# Altium PCB SAMV71_Xplained_Ultra.PcbDoc (part 6 of 9)
Units mm, origin at the board's own origin, x right, y up, seen from the top; angles counter-clockwise.
Board outline 90 x 135 mm, 8 copper layers (Top Layer LF-Signals, Ground Plane 1 (GND), Power Plane (VCC), Ground Plane 2 (GND), Signal Layer 1, Signal Layer 2, Ground Plane 3 (GND), Bottom Layer LF-Signals), stack 1.632 mm thick; 483 components, 411 nets, 1994 pads, 1021 vias.
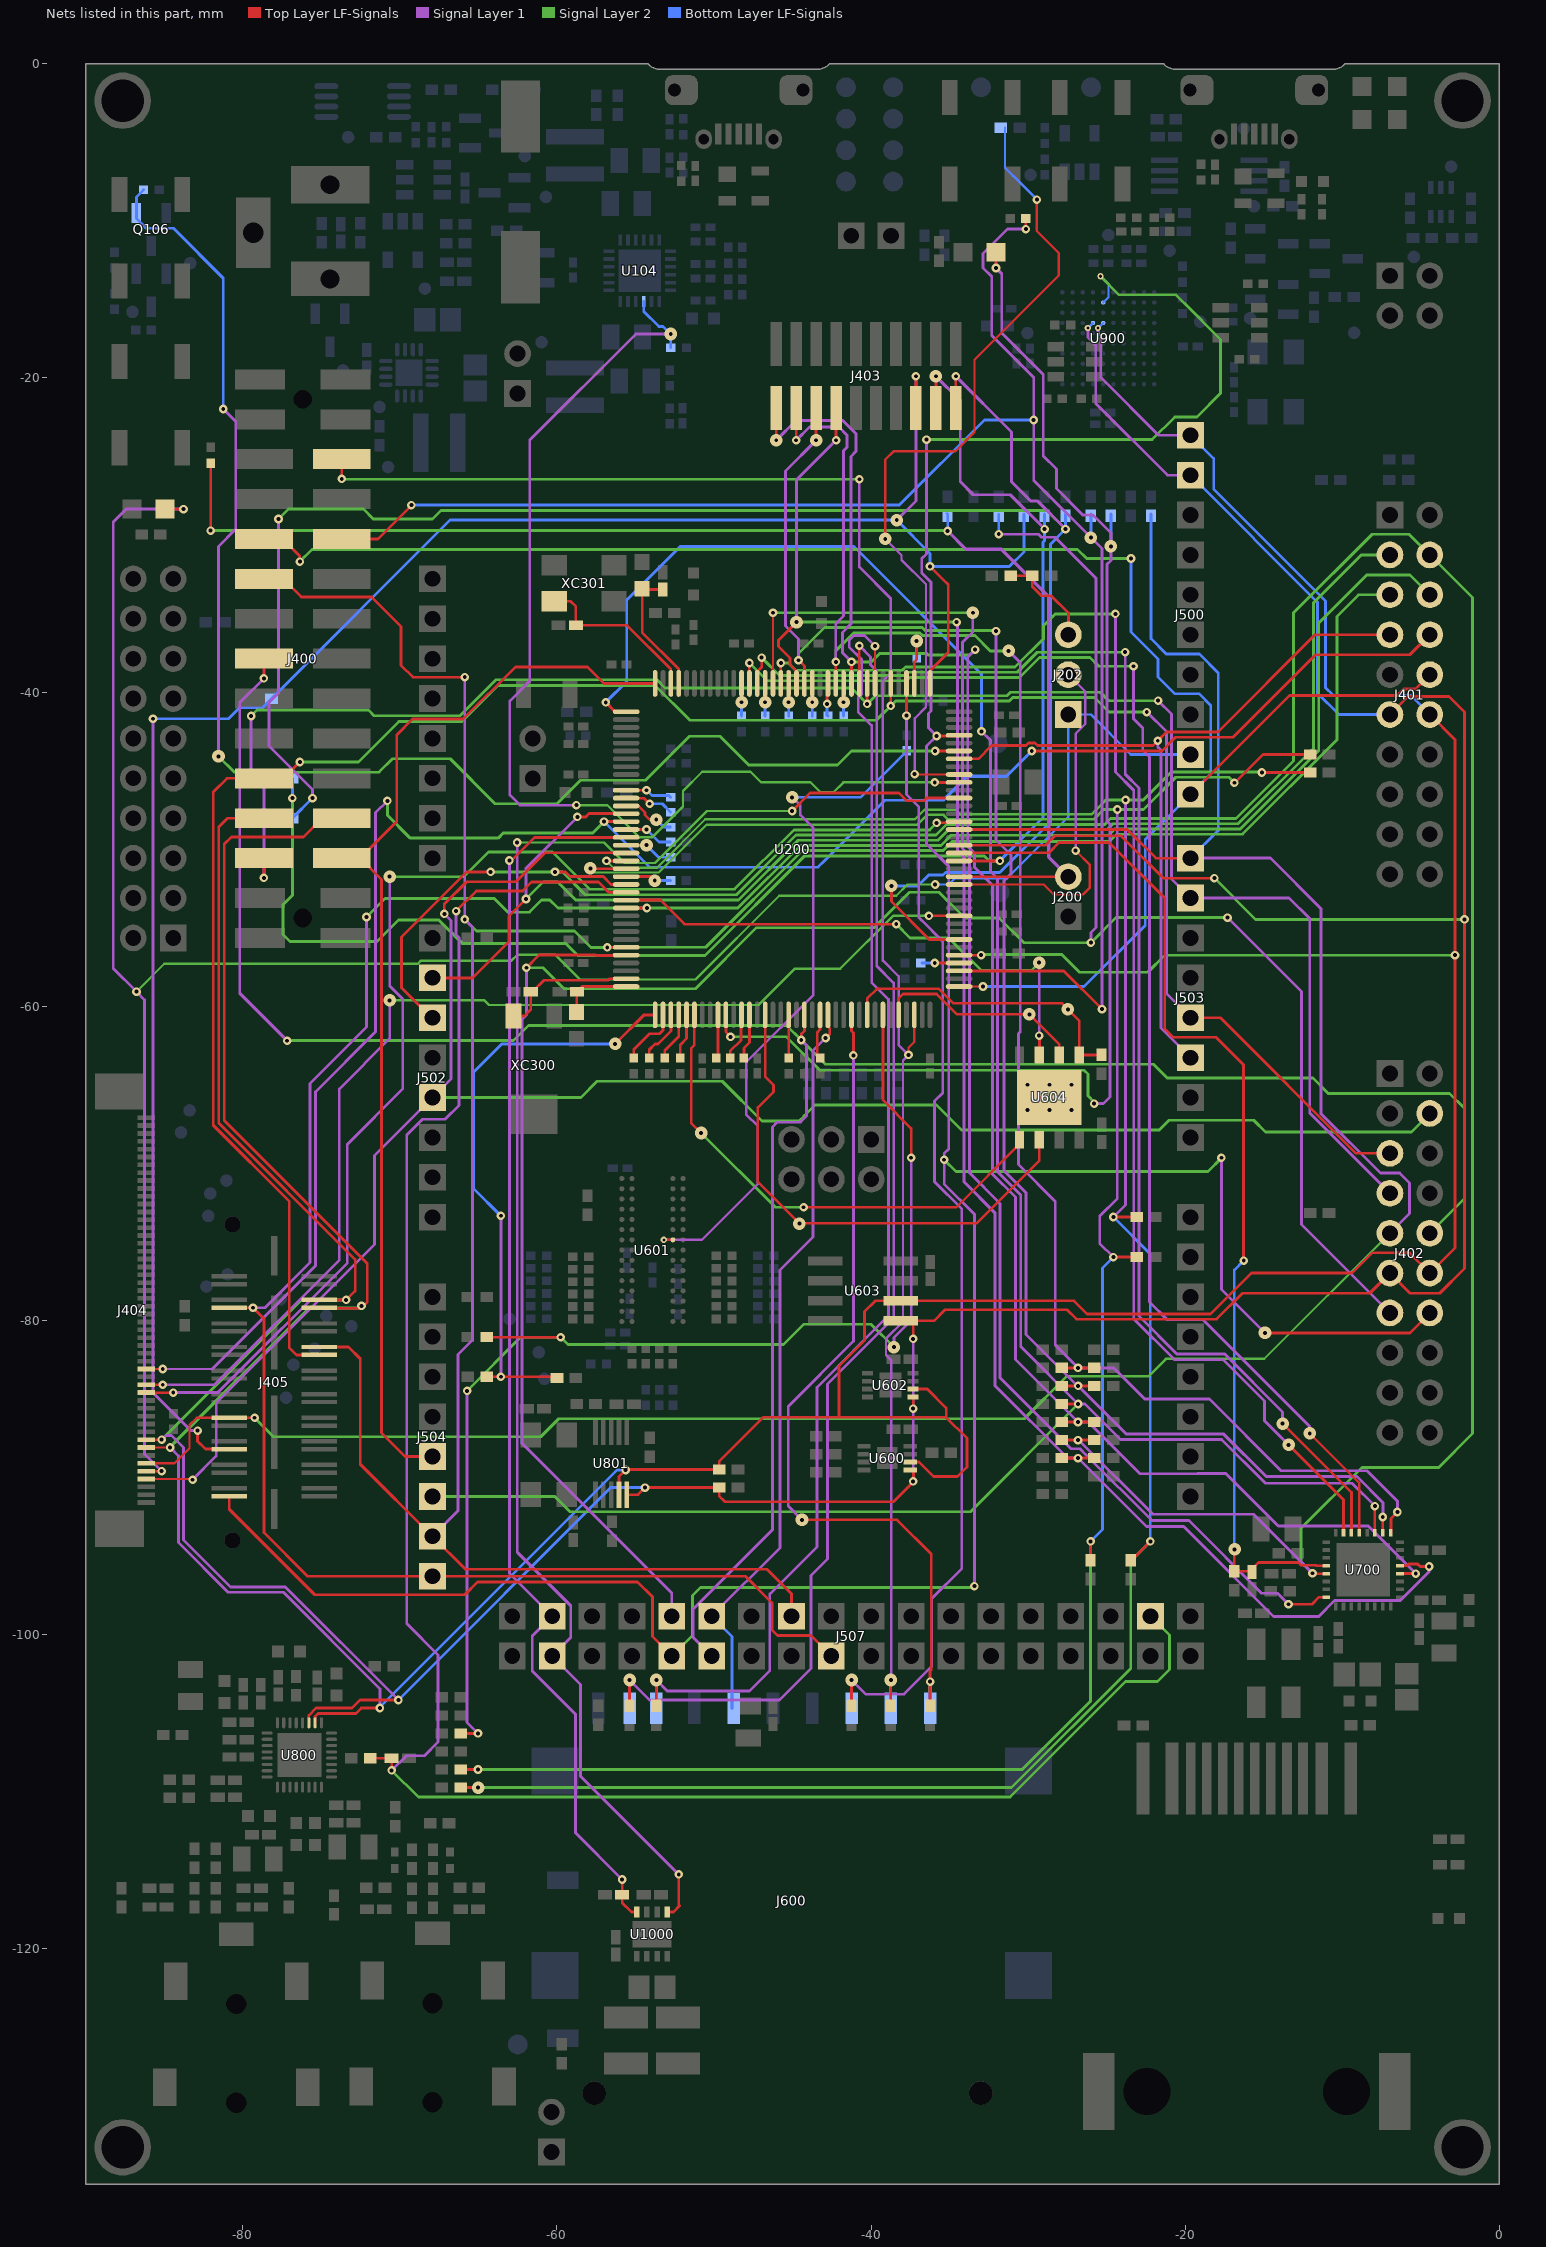
[diagram p11: the nets of this part, all layers, seen from the top]

## Via types
v1: diameter 0.55, hole 0.25, Top Layer LF-Signals to Bottom Layer LF-Signals, 546 vias
v2: diameter 0.55, hole 0.25, Top Layer LF-Signals to Bottom Layer LF-Signals, tented both sides, 190 vias
v3: diameter 0.55/0.55/0.55/0.8 (per signal layer), hole 0.25, Top Layer LF-Signals to Bottom Layer LF-Signals, tented top, 179 vias
v4: diameter 0.4, hole 0.2, Top Layer LF-Signals to Bottom Layer LF-Signals, 40 vias
v5: diameter 0.55, hole 0.25, Top Layer LF-Signals to Bottom Layer LF-Signals, tented top, 24 vias
v6: diameter 0.4, hole 0.2, Top Layer LF-Signals to Bottom Layer LF-Signals, tented both sides, 16 vias
v7: diameter 0.7, hole 0.35, Top Layer LF-Signals to Bottom Layer LF-Signals, 9 vias
v8: diameter 0.4/0.4/0.4/0.8 (per signal layer), hole 0.2, Top Layer LF-Signals to Bottom Layer LF-Signals, tented top, 6 vias
v9: diameter 0.4, hole 0.2, Top Layer LF-Signals to Bottom Layer LF-Signals, tented top, 5 vias
v10: diameter 0.66, hole 0.33, Top Layer LF-Signals to Bottom Layer LF-Signals, tented top, 4 vias
v11: diameter 0.55/0.55/0.55/0.8 (per signal layer), hole 0.25, Top Layer LF-Signals to Bottom Layer LF-Signals, 2 vias

## Nets (pads, with @x,y where several pads share a name; then routed paths per layer and width w, separated by ;. In a path a pad name is that pad's centre, name@x,y a point inside that pad or via, vN(x,y) a via of type N, cw(c..) or ccw(c..) an arc to the next point about the centre after c; other vN are vias at no path point) (continued)
NWR1/NBS1: R269.2 U601.J2 | length 43.8
  Top Layer LF-Signals w0.179: v4(-53.197,-74.875) U601.J2@-52.622,-74.875
  Signal Layer 1 w0.155: v4(-53.197,-74.875) -50.784,-74.875 -47.213,-71.303 -47.213,-67.636 -47.963,-66.886 -47.963,-63.572 -43.675,-59.284 -43.675,-48.66 -44.506,-47.83 -44.506,-47.221 v3(-45.025,-46.702)
  Bottom Layer LF-Signals w0.179: v3(-45.025,-46.702) -40.677,-46.702 R269.2@-37.725,-43.75
PA00: J401.7@-6.97,-36.35 J503.3@-19.67,-63.274 U200.102 | length 51.9
  Top Layer LF-Signals w0.175: U200.102@-34.4,-44.25 -33.175,-44.25 -32.325,-43.4 -30.149,-43.4 -29.987,-43.237 -29.563,-43.237 -29.401,-43.4 -22.05,-43.4 v1(-21.75,-43.1) -21.19,-42.54 -17.92,-42.54 -11.73,-36.35 J401.7@-6.97,-36.35
  Signal Layer 1 w0.175: v1(-21.75,-43.1) -21.75,-43.489 -21.55,-43.689 -21.55,-61.394 J503.3@-19.67,-63.274
PA01: R134.1 U104.3 U200.99 | length 71.6
  Top Layer LF-Signals w0.18: v1(-35.952,-45.752) -34.448,-45.752 -34.423,-45.727 U200.99@-34.4,-45.75
  Signal Layer 1 w0.175: v1(-58.771,-47.2) -62.359,-47.2 -63,-46.559 -63,-40.575 -61.732,-39.307 -61.732,-23.957 -54.98,-17.205 v3(-52.757,-17.205)
  Signal Layer 2 w0.15: v1(-58.771,-47.2) -56.797,-47.2 -54.747,-49.25 -53.953,-49.25 -51.982,-47.279 -51.982,-46.302 -50.755,-45.075 -47.677,-45.075 -47.012,-45.74 -43.867,-45.74 -43.229,-46.378 -42.389,-46.378 -41.764,-45.752 v1(-35.952,-45.752) v1@-35.964,-45.74
  Bottom Layer LF-Signals w0.175: U104.3@-54.482,-15.13 -54.482,-15.755 -53.519,-16.718 -53.244,-16.718 v3(-52.757,-17.205) R134.1@-52.757,-18.08
PA02: J402.9@-6.97,-74.45 J404.45 J405.16 J503.8@-19.67,-50.574 R914.1 U200.93 | length 162.1
  Top Layer LF-Signals w0.15: J404.45@-86.15,-89.1 -84.35,-89.1 -83.393,-88.143 -83.393,-86.668 -82.925,-86.2 J405.16@-80.87,-86.2 v1(-79.25,-86.2)
  Top Layer LF-Signals w0.175: U200.93@-34.4,-48.75 -23.695,-48.75 -21.871,-50.574 J503.8@-19.67,-50.574
  Signal Layer 1 w0.18: J503.8@-19.67,-50.574 -14.576,-50.574 -11.35,-53.8 -11.35,-66.85 -7.575,-70.625 -6.35,-70.625 -5.725,-71.25 -5.725,-73.205 J402.9@-6.97,-74.45
  Signal Layer 2 w0.15: -21.225,-82.45 -14.97,-82.45 J402.9@-6.97,-74.45
  Signal Layer 2 w0.175: v1(-79.25,-86.2) -78.038,-87.412 -61.037,-87.412 -59.888,-86.263 -30.252,-86.263 -27.555,-83.567 -22.342,-83.567 -21.225,-82.45
  Bottom Layer LF-Signals w0.175: R914.1@-22.184,-28.668 -22.184,-36.602 -21.211,-37.575 -19.1,-37.575 -17.9,-38.775 -17.9,-48.804 J503.8@-19.67,-50.574
PA03: J400.8 J401.11@-6.97,-41.43 J402.11@-6.97,-76.99 J404.42 J405.35 J500.9@-19.67,-26.19 R232.2 U200.91 U600.5 U602.5 U603.5 U800.3 U801.10 U900.G7 | length 290.5
  Top Layer LF-Signals w0.15: J404.42@-86.15,-87.6 v1(-85.175,-87.6)
  Top Layer LF-Signals w0.175: J400.8@-78.661,-48.034 -80.984,-48.034 -81.536,-48.586 -81.536,-67.434 -72.85,-76.12 -72.85,-78.125 v1(-73.425,-78.7) J405.35@-75.13,-78.7 ; U800.3@-75.8,-105.625 -75.8,-105.148 -75.34,-104.687 -73.063,-104.687 -72.543,-104.168 -70.107,-104.168 v1(-70.1,-104.175) ; U801.10@-55.55,-91.1 -54.85,-91.1 v1(-54.4,-90.65) R232.2@-49.675,-90.65 -49.675,-91.175 -49.3,-91.55 -38.575,-91.55 v1@-37.3,-90.275 ; U603.5@-38.125,-80.03 U603.5@-37.37,-80.03 ; U600.5@-37.5,-89.525 -37.3,-89.525 v1@-37.3,-90.25 ; v1(-37.325,-85.625) U602.5@-37.325,-84.875 ; v1(-37.325,-81.175) -37.325,-80.075 U603.5@-37.37,-80.03 ; U200.91@-34.4,-49.75 -28.906,-49.75 -28.31,-49.154 -24.096,-49.154 -21.4,-51.85 v1(-18.15,-51.85) ; J401.11@-6.97,-41.43 -5.824,-40.284 -3.216,-40.284 -2.225,-41.275 v1(-2.225,-54.475) -2.225,-76.7 -3.8,-78.275 -5.685,-78.275 J402.11@-6.97,-76.99 -8.255,-78.275 -16.35,-78.275 -18.001,-79.926 -26.918,-79.926 -27.52,-79.325 -35.3,-79.325 -36.005,-80.03 U603.5@-37.37,-80.03
  Signal Layer 1 w0.175: v1(-85.175,-87.6) -84.9,-87.325 -84.55,-87.325 -83.775,-88.1 -83.775,-93.975 -80.775,-96.975 -77.3,-96.975 v1(-70.1,-104.175) ; v1(-37.325,-90.25) v1(-37.325,-85.625) v1(-37.325,-81.175) ; v6(-26.2,-16.825) -26.2,-17.425 -25.7,-17.925 -25.7,-21.629 -21.139,-26.19 J500.9@-19.67,-26.19
  Signal Layer 2 w0.175: v1(-85.175,-87.6) -76.275,-78.7 v1(-73.425,-78.7) ; v1(-18.15,-51.85) -15.525,-54.475 v1(-2.225,-54.475)
  Bottom Layer LF-Signals w0.15: v6(-26.2,-16.825) U900.G7@-25.875,-16.5
  Bottom Layer LF-Signals w0.175: v1(-70.1,-104.175) -56.575,-90.65 v1(-54.4,-90.65) ; J500.9@-19.67,-26.19 -11.575,-34.285 -11.575,-40.075 -10.22,-41.43 J401.11@-6.97,-41.43
PA04: J400.7 J401.12@-4.43,-41.43 J402.12@-4.43,-76.99 J404.43 J405.33 J500.10@-19.67,-23.65 R231.2 U200.77 U600.6 U602.6 U603.6 U800.2 U801.9 U900.F7 | length 301.2
  Top Layer LF-Signals w0.15: J404.43@-86.15,-88.1 v1(-84.625,-88.1)
  Top Layer LF-Signals w0.175: U800.2@-75.4,-105.625 -75.4,-105.225 -75.2,-105.025 -72.8,-105.025 -72.455,-104.68 v1(-71.275,-104.68) ; J405.33@-75.13,-79.2 -75.105,-79.225 -72.475,-79.225 -72.45,-79.2 -72.075,-78.825 -72.075,-76.4 -81.186,-67.289 -81.186,-49.686 -80.725,-49.225 -76.15,-49.225 -74.959,-48.034 J400.7@-73.708,-48.034 ; U801.9@-56.05,-91.1 -56.05,-89.948 v1(-55.627,-89.525) -55.602,-89.5 R231.2@-49.675,-89.5 -49.675,-88.975 -46.875,-86.175 -42.05,-86.175 ; U600.6@-37.5,-89.025 -36.95,-89.025 -36.025,-89.95 -34.5,-89.95 -33.9,-89.35 -33.9,-87.5 -35.225,-86.175 ; U602.6@-37.325,-84.375 -36.425,-84.375 -35.225,-85.575 -35.225,-86.175 ; U200.77@-34.4,-56.75 v1(-33,-56.75) ; J401.12@-4.43,-41.43 -2.825,-43.035 v1(-2.825,-56.75) -2.825,-75.385 J402.12@-4.43,-76.99 -5.72,-75.7 -8.1,-75.7 -9.39,-76.99 -15.79,-76.99 -18.401,-79.601 -26.249,-79.601 -27.09,-78.76 U603.6@-38.125,-78.76 -39.735,-78.76 -40.425,-79.45 -40.425,-81.275 -42.05,-82.9 -42.05,-86.175 ; -42.05,-86.175 -35.225,-86.175
  Signal Layer 1 w0.175: v1(-84.625,-88.1) -84.1,-88.625 -84.1,-94.15 -80.94,-97.31 -77.425,-97.31 -71.275,-103.46 v1(-71.275,-104.68) ; v6(-25.55,-16.825) -25.55,-17.125 -25.375,-17.3 -25.375,-19.975 -21.7,-23.65 J500.10@-19.67,-23.65
  Signal Layer 2 w0.175: v1(-84.625,-88.1) -84.625,-88.05 -75.787,-79.213 -72.463,-79.213 v1@-72.45,-79.2 ; v1(-33,-56.75) -32.962,-56.712 -27.863,-56.712 -26.736,-57.84 -22.39,-57.84 -21.3,-56.75 v1(-2.825,-56.75)
  Bottom Layer LF-Signals w0.15: v6(-25.55,-16.825) U900.F7@-25.225,-16.5
  Bottom Layer LF-Signals w0.175: v1@-71.155,-104.68 v1(-71.275,-104.68) -71.275,-104.625 -56.175,-89.525 v1(-55.627,-89.525) ; J500.10@-19.67,-23.65 -18.192,-25.127 -18.192,-27.083 -11.075,-34.2 -11.075,-39.725 -10.6,-40.2 -5.66,-40.2 J401.12@-4.43,-41.43
  other v1: -72.45,-79.075
PA05: J400.22 J401.10@-4.43,-38.89 J500.1@-19.67,-46.51 U200.73 | length 117.2
  Top Layer LF-Signals w0.15: U200.73@-34.4,-58.75 v1(-32.875,-58.75) ; J500.1@-19.67,-46.51 J500.1@-19.23,-46.95
  Top Layer LF-Signals w0.175: J400.22@-78.661,-30.254 -77.446,-30.254 -76.375,-31.325 v1(-76.375,-31.7) ; J500.1@-19.67,-46.51 -13.371,-40.211 -6.504,-40.211 -6.099,-39.807 -5.347,-39.807 J401.10@-4.43,-38.89
  Signal Layer 2 w0.175: v1(-76.375,-31.7) -75.591,-30.916 -26.859,-30.916 -26.275,-31.5 v1(-23.459,-31.5)
  Bottom Layer LF-Signals w0.175: v1(-32.875,-58.75) -26.45,-58.75 -22.55,-54.85 -22.55,-49.39 J500.1@-19.67,-46.51 -18.375,-45.215 -18.375,-40.85 -19.125,-40.1 -20.675,-40.1 -21.738,-39.037 -21.738,-37.887 -23.459,-36.166 v1(-23.459,-31.5)
PA06: J400.10 J402.5@-6.97,-69.37 J405.25 J503.4@-19.67,-60.734 U200.114 | length 142
  Top Layer LF-Signals w0.175: v1(-76.375,-44.45) -77.419,-45.494 J400.10@-78.661,-45.494 -81.019,-45.494 -81.886,-46.361 -81.886,-67.579 -77.05,-72.415 -77.05,-81.725 -76.575,-82.2 J405.25@-75.13,-82.2 ; J503.4@-19.67,-60.734 -17.766,-60.734 -9.13,-69.37 J402.5@-6.97,-69.37
  Top Layer LF-Signals w0.18: v1(-38.75,-40.875) U200.114@-38.75,-39.45
  Signal Layer 1 w0.18: v1(-22.45,-41.275) -21.205,-42.52 -21.205,-59.199 J503.4@-19.67,-60.734
  Signal Layer 2 w0.175: v1(-76.375,-44.45) -72.65,-44.45 -70.064,-41.864
  Signal Layer 2 w0.18: -70.064,-41.864 -66.063,-41.864 -63.774,-39.575 -53.75,-39.575 -51.53,-41.795 -39.67,-41.795 -38.436,-40.561 -31.209,-40.561 -30.988,-40.34 -25.785,-40.34 -24.85,-41.275 v1(-22.45,-41.275)
PA07_XIN32: C301.1 U200.35 XC300.2 | length 8.8
  Top Layer LF-Signals w0.175: XC300.2@-62.775,-60.625 -62.075,-60.625 -61.675,-60.225 C301.1@-61.675,-59.075 -61.55,-59.075 -60.825,-58.35 -56.75,-58.35 -56.65,-58.25 U200.35@-55.6,-58.25
PA08_XOUT32: C300.1 J300.2 U200.36 | length 4.6
  Top Layer LF-Signals w0.175: J300.2@-58.75,-60.375 -58.75,-59.1 C300.1@-58.725,-59.075 -58.4,-58.75 U200.36@-55.6,-58.75
PA09: J400.21 R300.2 R911.1 U200.75 | length 114.1
  Top Layer LF-Signals w0.175: J400.21@-73.708,-30.254 -71.404,-30.254 -69.275,-28.125 v1(-69.275,-28.1) ; v2(-30.15,-10.525) R300.2@-30.15,-9.85
  Top Layer LF-Signals w0.18: U200.75@-34.4,-57.75 -27.734,-57.75 v1(-25.3,-60.184)
  Signal Layer 1 w0.18: v2(-30.15,-10.525) -31.325,-10.525 -32.875,-12.075 -32.875,-13 -32.325,-13.55 -32.325,-17.308 -29.65,-19.983 v1(-29.65,-22.675) -29.65,-26.525 v3(-26.009,-30.166) -25.305,-30.87 -25.305,-60.179 v1(-25.3,-60.184)
  Bottom Layer LF-Signals w0.175: v3(-26.009,-30.166) R911.1@-26.009,-28.668
  Bottom Layer LF-Signals w0.18: v1(-69.275,-28.1) -38.208,-28.1 -32.783,-22.675 v1(-29.65,-22.675)
PA10: R220.1 R228.1 U200.66 | length 80.2
  Top Layer LF-Signals w0.175: R228.1@-66.125,-106.3 v1(-65.025,-106.3) ; R220.1@-64.475,-81.069 v1@-59.769,-81.069 ; U200.66@-39.25,-60.55 -39.25,-65.975 -37.45,-67.775 v1(-37.45,-69.65)
  Signal Layer 1 w0.175: v1(-65.725,-84.489) -65.725,-105.6 v1(-65.025,-106.3) ; v3(-38.55,-81.7) -38.55,-81.104 -37.45,-80.004 v1(-37.45,-69.65)
  Signal Layer 2 w0.175: v1(-65.725,-84.489) -62.311,-81.075 v1(-59.769,-81.075) -59.307,-81.538 -45.577,-81.538 -44.295,-80.256 -39.994,-80.256 v3(-38.55,-81.7) v3@-38.563,-81.713
PA11: R605.2 U200.64 U604.1 | length 19.2
  Top Layer LF-Signals w0.165: U200.64@-40.25,-60.55 -40.25,-59.514 -39.636,-58.9 -35.69,-58.9 -34.765,-59.825 -27.85,-59.825 -26.745,-60.93 U604.1@-26.745,-63.1
  Top Layer LF-Signals w0.175: U604.1@-26.745,-63.1 R605.2@-25.325,-63.1
  other v3: -27.475,-60.2
PA12: U200.68 U604.2 | length 13.4
  Top Layer LF-Signals w0.165: U200.68@-38.25,-60.55 -38.25,-59.514 -37.961,-59.225 -35.825,-59.225 -34.525,-60.525 v3(-29.925,-60.525) -28.015,-62.435 U604.2@-28.015,-63.1
PA13: U200.42 U604.5 | length 32
  Top Layer LF-Signals w0.165: U200.42@-51.25,-60.55 -51.258,-60.558 -51.258,-62.235 -51.25,-62.243 -51.25,-62.484 -51.442,-62.676 -51.442,-67.458 v3(-50.825,-68.075) ; v1(-44.3,-72.8) -34.572,-72.8 U604.5@-30.555,-68.783
  Top Layer LF-Signals w0.175: U604.5@-30.555,-68.783 U604.5@-30.555,-68.5
  Signal Layer 2 w0.175: v3(-50.825,-68.075) -46.1,-72.8 v1(-44.3,-72.8)
PA14: U200.51 U604.6 | length 33.3
  Top Layer LF-Signals w0.15: U200.51@-46.75,-60.55 U200.51@-46.717,-60.583
  Top Layer LF-Signals w0.165: U200.51@-46.75,-60.55 -46.75,-64.485 -46.216,-65.019 -46.216,-65.454 -47.212,-66.45 -47.212,-71.197 v3(-44.567,-73.842) ; v3@-44.567,-73.82 -33.286,-73.82 -29.285,-69.819 U604.6@-29.285,-68.5
PA15: R249.1 U200.49 | length 2.9
  Top Layer LF-Signals w0.179: R249.1@-48.1,-63.3 -48.1,-62.655 -47.75,-62.305 U200.49@-47.75,-60.55 U200.49@-47.775,-60.575
PA16: R250.1 U200.45 | length 2.8
  Top Layer LF-Signals w0.179: R250.1@-49.85,-63.3 -49.75,-63.2 U200.45@-49.75,-60.55
PA17: U200.25 U604.3 | length 34.3
  Top Layer LF-Signals w0.175: U200.25@-55.6,-53.25 -55.6,-53.237 -53.419,-53.237 -51.881,-54.775 v1@-38.375,-54.775 ; v1(-29.3,-61.875) -29.285,-61.89 U604.3@-29.285,-63.1
  Signal Layer 1 w0.175: v1(-29.3,-61.875) v3(-29.3,-57.225)
  Signal Layer 2 w0.175: v1(-38.4,-54.775) -37.525,-55.65 -35.06,-55.65 -32.985,-57.725 -29.8,-57.725 v3(-29.3,-57.225)
PA18: C800.2 J507.3 R801.1 U200.24 | length 131.2
  Top Layer LF-Signals w0.15: v1(-70.525,-108.65) C800.2@-70.525,-107.875
  Top Layer LF-Signals w0.175: R801.1@-71.9,-107.875 C800.2@-70.525,-107.875 ; v1(-66.425,-53.95) -65.137,-52.662 -62.184,-52.662 -61.62,-52.098 -57.358,-52.098 -56.706,-52.75 U200.24@-55.6,-52.75
  Signal Layer 1 w0.175: v1(-70.525,-108.65) -69.6,-107.725 -68.45,-107.725 -67.575,-106.85 -67.575,-101.3 -69.56,-99.315 -69.56,-68.185 -68.575,-67.2 -67.125,-67.2 -66.241,-66.316 -66.241,-55.634 -66.425,-55.45 v1(-66.425,-53.95)
  Signal Layer 2 w0.175: v1(-70.525,-108.65) -68.825,-110.35 -31.151,-110.35 -23.801,-103 -21.775,-103 -21,-102.225 -21,-100.044 J507.3@-22.21,-98.834
PA19: J401.4@-4.43,-31.27 J502.3@-67.93,-60.734 R706.1 R720.1 U200.23 U700.29 | length 189.3
  Top Layer LF-Signals w0.15: v1(-11.9,-96.1) -11.875,-96.125 U700.29@-11.025,-96.125
  Top Layer LF-Signals w0.18: J502.3@-67.93,-60.734 -67.991,-60.734 -69.9,-58.825 -69.9,-55.585 -65.765,-51.45 v1(-64.225,-51.45) ; v1(-60.125,-51.45) -59.472,-51.45 -59.169,-51.753 -57.053,-51.753 -56.556,-52.25 U200.23@-55.6,-52.25 U200.23@-55.615,-52.265 ; R706.1@-27.869,-87.623 R720.1@-25.794,-87.623
  Signal Layer 1 w0.18: v1@-26.863,-87.623 v1(-26.825,-87.623) -26.787,-87.623 -22.061,-92.349 -15.651,-92.349 v1(-11.9,-96.1)
  Signal Layer 2 w0.18: v1(-64.225,-51.45) v1(-60.125,-51.45) -59.654,-51.45 -58.199,-52.905 -48.581,-52.905 -44.779,-49.103 -35.872,-49.103 -35.198,-48.429 -25.129,-48.429 -24.758,-48.058 -16.771,-48.058 -13.1,-44.387 -13.1,-34.955 -8.095,-29.95 -5.75,-29.95 J401.4@-4.43,-31.27 -1.71,-33.99 -1.71,-87.203 -3.866,-89.359 -8.747,-89.359 -12.629,-93.241 -12.629,-95.371 v1(-11.9,-96.1)
PA20: R262.1 U200.22 | length 2.9
  Top Layer LF-Signals w0.179: U200.22@-55.6,-51.75 -54.025,-51.75 v3(-53.775,-52)
  Bottom Layer LF-Signals w0.179: v3(-53.775,-52) R262.1@-52.767,-52
PA21: J402.13@-6.97,-79.53 J507.27 R910.1 U200.32 | length 163.2
  Top Layer LF-Signals w0.18: v1(-61.95,-57.55) -61.135,-56.735 -57.538,-56.735 -57.508,-56.765 -55.6,-56.765 U200.32@-55.6,-56.75
  Signal Layer 1 w0.18: v1(-61.95,-57.55) -61.95,-60.563 -62.22,-60.833 -62.22,-87.83 -52.69,-97.36 J507.27@-52.69,-98.834 ; v1(-31.875,-29.95) -29.353,-29.95 -29.163,-30.14 -28.301,-30.14 -25.685,-32.756 -25.685,-54.99 -26.009,-55.314 v1(-26.009,-55.957) ; v1(-17.307,-54.362) -12.595,-59.074 -12.595,-73.905 J402.13@-6.97,-79.53
  Signal Layer 2 w0.15: -36.154,-52.75 -36.133,-52.75 -35.663,-52.75
  Signal Layer 2 w0.18: v1(-61.95,-57.55) -60.9,-57.55 -59.557,-58.893 -51.186,-58.893 -47.293,-55 -39.802,-55 -37.552,-52.75 -36.154,-52.75 ; -35.663,-52.75 -34.029,-54.384 -31.848,-54.384 -30.275,-55.957 v1(-26.009,-55.957) -24.414,-54.362 v1(-17.307,-54.362)
  Bottom Layer LF-Signals w0.18: v1(-31.875,-29.95) R910.1@-31.875,-28.675
PA22: R221.1 R225.1 U200.37 | length 37.7
  Top Layer LF-Signals w0.185: R221.1@-64.475,-83.594 v1(-63.575,-83.594) -60.081,-83.594 R225.1@-60,-83.675 ; v3(-56.303,-62.403) -54.45,-60.55 U200.37@-53.75,-60.55
  Signal Layer 1 w0.185: v1@-63.575,-83.6 v1(-63.575,-83.594) v1(-63.575,-73.339)
  Bottom Layer LF-Signals w0.185: v1(-63.575,-73.339) -65.317,-71.597 -65.317,-64.2 -63.519,-62.403 v3(-56.303,-62.403)
PA23: D301.1 R912.1 U200.46 | length 87.9
  Top Layer LF-Signals w0.18: U200.46@-49.25,-60.55 -49.25,-61.65 v1(-48.95,-61.95) ; v1(-32.05,-13) D301.1@-32.05,-12
  Signal Layer 1 w0.175: -29.475,-19.35 -29.042,-19.783 -29.042,-21.925
  Signal Layer 1 w0.18: v1(-32.05,-13) -31.684,-13.366 -31.684,-17.141 -29.475,-19.35 ; -29.042,-21.925 -29.042,-24.965 -28.2,-25.807 -28.2,-27.05 -26.525,-28.725 -25.875,-28.725 -24.734,-29.866 v3(-24.734,-30.725) -24.734,-31.623 -24.975,-31.864 -24.975,-48.225 -24.785,-48.415 -24.785,-65.775 -25.21,-66.2 v1(-25.8,-66.2)
  Signal Layer 2 w0.18: v1(-48.95,-61.95) -45.378,-61.95 -43.253,-64.075 -26.45,-64.075 -26.2,-64.325 -26.2,-65.7 -25.8,-66.1 v1(-25.8,-66.2)
  Bottom Layer LF-Signals w0.175: v3(-24.734,-30.725) R912.1@-24.734,-28.668
PA24: J400.16 J402.10@-4.43,-74.45 J507.26 U200.56 | length 158.2
  Top Layer LF-Signals w0.175: v1@-78.661,-39.127 J400.16@-78.661,-37.874
  Top Layer LF-Signals w0.18: v1@-44.329,-62.15 v1(-44.45,-62.15) -44.45,-61.768 -44.25,-61.568 U200.56@-44.25,-60.55
  Signal Layer 1 w0.18: v1(-78.658,-39.13) -80.2,-40.672 -80.2,-59.175 v1(-77.176,-62.199) ; J507.26@-50.15,-101.374 -51.325,-100.199 -51.325,-98.375 -46.285,-93.335 -46.285,-67.696 -45.972,-67.383 -44.506,-67.383 -44.115,-66.992 -44.115,-62.485 v1(-44.45,-62.15)
  Signal Layer 2 w0.18: v1(-77.176,-62.199) -77.161,-62.184 -62.771,-62.184 -61.809,-61.221 -45.379,-61.221 v1(-44.45,-62.15) ; v1@-44.319,-62.15 v1(-44.45,-62.15) ; J402.10@-4.43,-74.45 -2.225,-72.245 -2.225,-66.5 -3.175,-65.55 -10.9,-65.55 -11.875,-64.575 -21.15,-64.575 -22.025,-63.7 -42.9,-63.7 v1(-44.45,-62.15)
PA25: J507.25 J600.5 U200.59 | length 47.3
  Top Layer LF-Signals w0.175: v1(-42.9,-62.025) -42.63,-61.755 -42.63,-61.42 U200.59@-42.75,-61.3
  Signal Layer 1 w0.175: J507.25@-50.15,-98.834 -45.8,-94.484 -45.8,-76.8 -43.7,-74.7 -43.7,-62.825 v1(-42.9,-62.025) v1@-42.9,-62.175
  Bottom Layer LF-Signals w0.175: J507.25@-50.15,-98.834 -48.85,-100.134 J600.5@-48.85,-104.7
PA26: J600.9 R608.1 U200.62 | length 54.9
  Top Layer LF-Signals w0.175: v3(-44.4,-92.7) -38.35,-92.7 -36.175,-94.875 -36.175,-102.25 -36.248,-102.323 v1(-36.248,-103) -36.248,-104.545 R608.1@-36.253,-104.55 ; U200.62@-41.25,-60.55 -41.25,-61.575 -41.127,-61.698 v1(-41.127,-63.128)
  Signal Layer 1 w0.175: v3(-44.4,-92.7) -45.275,-91.825 -45.275,-85.475 -41.127,-81.327 v1(-41.127,-63.128)
  Bottom Layer LF-Signals w0.175: J600.9@-36.248,-104.7 v1(-36.248,-103) v1@-36.248,-102.9
PA27: J400.25 J600.1 R607.1 U200.70 | length 119.4
  Top Layer LF-Signals w0.15: v1(-37.625,-63.1) -37.625,-62.65 -37.252,-62.277 U200.70@-37.252,-60.552
  Top Layer LF-Signals w0.175: v5@-73.708,-26.427 J400.25@-73.708,-25.174 ; R607.1@-38.753,-104.55 v3@-38.753,-102.9 ; U200.70@-37.252,-60.552 U200.70@-37.25,-60.55
  Signal Layer 1 w0.15: -38.75,-36.275 -38.75,-38.8 -39.25,-39.3 -39.25,-57.1 -38.252,-58.098 -38.252,-62.473 v1(-37.625,-63.1) -37.975,-63.45 -37.975,-80.087 -39.05,-81.162 -39.05,-82.2 -38.725,-82.525 v3@-38.725,-102.9
  Signal Layer 1 w0.175: v1(-40.75,-26.45) -40.75,-32.05 -38.75,-34.05 -38.75,-36.275
  Signal Layer 2 w0.15: v5(-73.705,-26.43) -73.685,-26.45 v1(-40.75,-26.45)
  Bottom Layer LF-Signals w0.15: J600.1@-38.748,-104.7 v3(-38.748,-102.9)
  Bottom Layer LF-Signals w0.175: v1@-40.895,-26.43 -40.875,-26.45 v1(-40.75,-26.45)
PA28: J600.2 R606.1 U200.112 | length 74.9
  Top Layer LF-Signals w0.175: R606.1@-41.253,-104.55 v3@-41.253,-102.9 ; v1(-37.75,-41.5) U200.112@-37.75,-39.45
  Signal Layer 1 w0.175: v3(-41.248,-102.9) -40.348,-103.8 -37.9,-103.8 -36.15,-102.05 -36.15,-97.725 -34.225,-95.8 -34.225,-72.91 -35.959,-71.176 -35.959,-66.045 -35.437,-65.524 -35.437,-55.883 -36.806,-54.515 -36.809,-54.515 -36.964,-54.359 -36.964,-47.311 -37.75,-46.525 v1(-37.75,-41.5)
  Bottom Layer LF-Signals w0.175: J600.2@-41.248,-104.7 v3(-41.248,-102.9)
PA29: U200.129 U700.32 | length 94.1
  Top Layer LF-Signals w0.15: U200.129@-46.25,-39.45 -46.25,-35.675 v1(-46.25,-34.95)
  Top Layer LF-Signals w0.175: v1(-13.425,-98.075) -11.925,-98.075 -11.475,-97.625 U700.32@-11.025,-97.625
  Signal Layer 1 w0.175: v3(-33.525,-34.95) -33.525,-36.175 -34.18,-36.83 -34.18,-49.953 -33.745,-50.388 -33.745,-70.605 -31.795,-72.555 -31.795,-83.656 -27.276,-88.175 -26.698,-88.175 -26.312,-88.561 -26.312,-88.563 -22.126,-92.75 -19.775,-92.75 -15.15,-97.375 -14.125,-97.375 v1(-13.425,-98.075)
  Signal Layer 2 w0.15: v1(-46.25,-34.95) v3(-33.525,-34.95)
PA30: J600.7 R610.1 U200.116 | length 85.9
  Top Layer LF-Signals w0.15: U200.116@-39.75,-39.45 v1@-39.75,-37.1
  Top Layer LF-Signals w0.175: R610.1@-53.678,-104.55 v3(-53.678,-102.9) ; v1@-39.75,-37.1 v1(-39.75,-37.075)
  Signal Layer 1 w0.175: v3(-53.678,-102.9) -52.978,-103.6 -47.75,-103.6 -46.45,-102.3 -46.45,-97.425 -43.45,-94.425 -43.45,-84.265 -38.889,-79.705 -38.889,-59.561 -39.965,-58.485 -39.965,-42.121 -40.826,-41.26 -40.826,-40.334 -40.6,-40.108 -40.6,-37.925 -41.4,-37.125 -41.4,-36.7 -41.1,-36.4 -40.425,-36.4 v1(-39.75,-37.075)
  Bottom Layer LF-Signals w0.175: J600.7@-53.678,-104.7 v3(-53.678,-102.9)
PA31: J600.8 R609.1 U200.118 | length 87
  Top Layer LF-Signals w0.15: U200.118@-40.75,-39.45 v1(-40.75,-37.05)
  Top Layer LF-Signals w0.175: R609.1@-55.378,-104.55 v3(-55.378,-102.9)
  Signal Layer 1 w0.175: v3(-55.378,-102.9) -54.103,-104.175 -45.827,-104.175 -43.825,-102.173 -43.825,-96.25 -42.775,-95.2 -42.775,-84.05 -38.564,-79.839 -38.564,-58.529 -39.64,-57.454 -39.64,-38.66 -40.038,-38.262 -40.038,-37.762 v1(-40.75,-37.05)
  Bottom Layer LF-Signals w0.175: J600.8@-55.378,-104.7 v3(-55.378,-102.9)
PAD: U604.0
  other v1: -30.05,-66.6 -27.25,-66.6 -30.05,-65
  other v5: -28.65,-65 -27.25,-65
  other v11: -28.65,-66.6
PB00: R201.1 R208.1 R213.1 R226.1 U200.21 | length 154.6
  Top Layer LF-Signals w0.15: v3@-57.85,-51.25 -56.818,-51.25 U200.21@-55.6,-51.25
  Top Layer LF-Signals w0.175: R226.1@-66.125,-108.6 v1(-65.025,-108.6) ; v3(-57.875,-51.225) v3@-57.85,-51.25 ; v1@-16.863,-45.788 -15.05,-43.975 R201.1@-12.05,-43.975
  Top Layer LF-Signals w0.18: R213.1@-26.025,-95.269 v1(-26.025,-94.075) ; v1@-24.569,-75.969 R208.1@-23.1,-75.969
  Signal Layer 1 w0.175: v1(-24.575,-75.975) -25.45,-75.1 -25.45,-73.375 -24.325,-72.25 v1(-24.325,-47.475)
  Signal Layer 2 w0.15: v3(-57.875,-51.225) -57.615,-51.485 -53.517,-51.485 -50.477,-48.445 -37.052,-48.445
  Signal Layer 2 w0.175: -37.052,-48.433 -36.434,-47.815 -35.398,-47.815 -35.111,-48.102 -25.825,-48.102 -25.199,-47.475 v1(-24.325,-47.475) -22.66,-47.475 -20.607,-45.422 -17.228,-45.422 v1(-16.875,-45.775)
  Signal Layer 2 w0.18: v1(-65.025,-108.6) -30.375,-108.6 -26.025,-104.25 v1(-26.025,-94.075)
  Bottom Layer LF-Signals w0.18: v1(-26.025,-94.075) -25.275,-93.325 -25.275,-76.675 v1(-24.575,-75.975)
PB01: R202.1 R207.1 R211.1 R224.1 U200.20 | length 155.1
  Top Layer LF-Signals w0.18: R224.1@-66.125,-109.75 v3(-65.025,-109.75) ; v1(-56.85,-50.75) U200.20@-55.6,-50.75 ; v1@-24.569,-73.419 R207.1@-23.1,-73.419 ; R211.1@-23.475,-95.275 -23.425,-95.275 v1(-22.225,-94.075) ; v1(-15.125,-45.125) R202.1@-12.05,-45.125
  Signal Layer 1 w0.18: v1(-24.575,-73.425) -23.8,-72.65 v1(-23.8,-46.875)
  Signal Layer 2 w0.15: v1(-56.85,-50.75) -56.415,-51.185 -53.641,-51.185 -50.56,-48.103 -37.211,-48.103 -36.595,-47.487 -34.638,-47.487 -34.336,-47.789 -25.976,-47.789 -25.684,-47.498
  Signal Layer 2 w0.18: v3(-65.025,-109.75) -31.058,-109.75 -23.475,-102.167 -23.475,-95.325 v1(-22.225,-94.075) ; -25.684,-47.498 -25.062,-46.875 v1(-23.8,-46.875) -22.675,-46.875 -20.895,-45.095 -15.155,-45.095 v1(-15.125,-45.125)
  Bottom Layer LF-Signals w0.18: v1(-24.575,-73.425) -22.225,-75.775 v1(-22.225,-94.075)
PB02: J401.6@-4.43,-33.81 J405.34 J504.8@-67.93,-96.294 J507.20 U200.26 | length 169.3
  Top Layer LF-Signals w0.18: J405.34@-80.87,-79.2 v1(-79.35,-79.2) -78.65,-79.9 -78.65,-93.519 -75.875,-96.294 J504.8@-67.93,-96.294 -48,-96.294 -46.3,-97.994 -46.3,-99.725 -45.95,-100.075 -43.829,-100.075 J507.20@-42.53,-101.374 ; U200.26@-55.6,-53.75 v1@-54.3,-53.75
  Signal Layer 1 w0.18: v1(-79.35,-79.2) -78.6,-79.2 -75.725,-76.325 -75.725,-64.925 -72.125,-61.325 v1(-72.125,-54.325)
  Signal Layer 2 w0.18: v1(-72.125,-54.325) -70.95,-53.15 -63.997,-53.15 -63.134,-54.013 -61.758,-54.013 -60.98,-53.235 -60.46,-53.235 -59.945,-53.75 v1(-54.275,-53.75) -48.492,-53.75 -44.505,-49.763 -35.556,-49.763 -34.914,-49.121 -34.898,-49.121 -34.89,-49.112 -24.879,-49.112 -24.484,-48.717 -16.497,-48.717 -11.506,-43.726 -11.506,-35.606 -8.45,-32.55 -5.69,-32.55 J401.6@-4.43,-33.81
PB03: J400.20 J401.5@-6.97,-33.81 J405.27 J504.7@-67.93,-93.754 J507.21 U200.31 | length 189.5
  Top Layer LF-Signals w0.175: J400.20@-78.661,-32.794 -77.431,-32.794 -76.275,-33.95 -71.8,-33.95 -69.925,-35.825 -69.925,-38.3 -69.175,-39.05 v1(-65.875,-39.05) ; v1(-56.8,-56.25) U200.31@-55.6,-56.25
  Top Layer LF-Signals w0.18: J405.27@-75.13,-81.7 -73.275,-81.7 -72.525,-82.45 -72.525,-89.159 J504.7@-67.93,-93.754 -65.834,-95.85 -46.625,-95.85 -45.07,-97.405 J507.21@-45.07,-98.834
  Signal Layer 1 w0.175: J504.7@-67.93,-93.754 -66.3,-92.124 -66.3,-82.175 -65.379,-81.254 -65.379,-54.971 v1(-65.875,-54.475) v1(-65.875,-39.05)
  Signal Layer 2 w0.18: v1(-65.875,-54.475) -65.131,-55.219 -58.876,-55.219 -57.83,-56.265 -56.815,-56.265 v1(-56.8,-56.25) -50.526,-56.25 -44.369,-50.093 -35.404,-50.093 -34.835,-49.524 -24.824,-49.524 -24.347,-49.047 -16.361,-49.047 -10.35,-43.037 -10.35,-35.19 -8.97,-33.81 J401.5@-6.97,-33.81
PB04: J402.14@-4.43,-79.53 J405.2 J507.28 U200.105 U900.F9 | length 210.9
  Top Layer LF-Signals w0.175: v3(-14.925,-80.8) -5.7,-80.8 J402.14@-4.43,-79.53
  Top Layer LF-Signals w0.18: J405.2@-80.87,-91.2 -80.87,-92.03 -75.425,-97.475 -65.875,-97.475 -65.05,-96.65 -54.874,-96.65 -53.925,-97.599 -53.925,-100.139 J507.28@-52.69,-101.374 ; v1(-35.825,-42.8) -34.45,-42.8 U200.105@-34.4,-42.75
  Signal Layer 1 w0.175: v1@-17.7,-69.625 -17.7,-78.025 v3(-14.925,-80.8)
  Signal Layer 1 w0.18: v1(-36.477,-23.929) -36.477,-31.201 -36.781,-31.505 -36.781,-32.419 -36.19,-33.01 -36.19,-41.216 -36.35,-41.376 -36.35,-42.275 v1(-35.825,-42.8) -36.467,-43.442 -36.467,-49.683 -35.062,-51.088 -35.062,-69.097 -35.35,-69.385 v1(-35.35,-69.775) -35.35,-71.322 -33.425,-73.247 v1(-33.425,-96.925)
  Signal Layer 2 w0.175: v1(-35.35,-69.775) -34.6,-70.525 -18.55,-70.525 v1@-17.675,-69.65 ; v6(-25.4,-13.525) -24.213,-14.712 -20.588,-14.712 -20.05,-15.25
  Signal Layer 2 w0.18: J507.28@-52.69,-101.374 -51.375,-100.059 -51.375,-97.519 -50.856,-97 -33.5,-97 v1(-33.425,-96.925) ; v1(-36.477,-23.929) -22.107,-23.929 -20.664,-22.486 -19.259,-22.486 -17.747,-20.975 -17.747,-17.553 -20.05,-15.25
  Bottom Layer LF-Signals w0.125: -24.9,-14.879 -24.9,-14.025
  Bottom Layer LF-Signals w0.15: v6(-25.4,-13.525) -24.9,-14.025 ; U900.F9@-25.225,-15.2 -24.904,-14.879
  other v1: -17.7,-69.65
PB05: J403.6 J405.10 R403.2 R921.2 U200.109 | length 134.9
  Top Layer LF-Signals w0.185: v1(-82.875,-87.025) -82.9,-87.05 -82.9,-87.675 -82.375,-88.2 J405.10@-80.87,-88.2 ; J403.6@-37.15,-21.91 v1(-37.15,-19.893) ; U200.109@-36.25,-39.45 -36.25,-38.648 -35.089,-37.487 -35.089,-33.161 -35.425,-32.825 v1(-36.25,-32)
  Signal Layer 1 w0.185: v1(-85.725,-41.7) -85.725,-84.606 -83.306,-87.025 v1(-82.875,-87.025) ; v3(-38.368,-29.053) -37.15,-27.835 v1(-37.15,-19.893)
  Bottom Layer LF-Signals w0.185: v1(-85.725,-41.7) -80.923,-41.7 -80.223,-41 -78.756,-41 R403.2@-78.177,-40.421 -66.808,-29.053 v3(-38.368,-29.053) -36.25,-31.171 v1(-36.25,-32) -31.2,-32 -30.275,-31.075 R921.2@-30.275,-28.668
PB06_SWDIO: J403.2 R400.2 R905.2 U200.79 | length 125.3
  Top Layer LF-Signals w0.185: v3(-38.71,-52.341) -38.71,-53.336 -36.299,-55.747 -34.4,-55.747 U200.79@-34.4,-55.75 ; J403.2@-34.61,-21.91 v1(-34.61,-19.893)
  Signal Layer 1 w0.185: v1(-77.731,-28.981) -77.731,-40.066 -78.334,-40.669 -78.334,-43.437 -75.569,-46.202 v1(-75.569,-46.753) ; v1(-34.61,-19.893) -31.064,-23.44 -31.064,-26.614 -29.854,-27.823 -29.427,-27.823 v1(-27.625,-29.625)
  Signal Layer 2 w0.185: v1(-77.731,-28.981) -77.1,-28.35 -72.328,-28.35 -71.697,-28.981 -67.924,-28.981 -67.379,-28.437 -28.813,-28.437 v1(-27.625,-29.625)
  Bottom Layer LF-Signals w0.185: R400.2@-76.85,-48.034 v1(-75.569,-46.753) ; v3(-38.71,-52.341) -37.029,-52.341 -36.336,-51.648 -35.425,-51.648 -35.274,-51.497 -31.815,-51.497 -28.588,-48.27 -28.588,-30.588 v1(-27.625,-29.625) R905.2@-27.625,-28.668
PB07_SWCLK: J403.4 R401.2 R904.2 U200.89 | length 102.1
  Top Layer LF-Signals w0.185: J403.4@-35.88,-21.91 v3(-35.88,-19.893) ; U200.89@-34.4,-50.75 v1(-31.8,-50.75)
  Signal Layer 1 w0.185: v3(-35.88,-19.893) -34.328,-21.446 -34.328,-26.602 -33.492,-27.438 -31.137,-27.438 v1(-28.95,-29.625)
  Signal Layer 2 w0.185: v1(-76.85,-46.753) -76.85,-52.949 -77.442,-53.541 -77.442,-55.438 -77,-55.88 -71.467,-55.88 -70.093,-54.506 -67.526,-54.506 -66.034,-55.998 -59.45,-55.998 -58.681,-56.768 -50.573,-56.768 -44.231,-50.426 -32.805,-50.426 -32.481,-50.75 v1(-31.8,-50.75) v1@-31.803,-50.747
  Bottom Layer LF-Signals w0.185: v1(-76.85,-46.753) R401.2@-76.85,-45.494 ; v1@-31.815,-50.735 -29.057,-47.977 -29.057,-30.46 -28.95,-30.352 v1(-28.95,-29.625) R904.2@-28.95,-28.668
PB08_XOUT: C302.1 J301.2 U200.141 | length 8.2
  Top Layer LF-Signals w0.175: J301.2@-54.575,-33.425 -54.575,-36.2 -52.25,-38.525 U200.141@-52.25,-39.45 ; J301.2@-54.525,-33.475 C302.1@-53.275,-33.475
PB09_XIN: C303.1 U200.142 XC301.1 | length 10.8
  Top Layer LF-Signals w0.175: XC301.1@-60.175,-34.225 -59.125,-34.225 -58.8,-34.55 C303.1@-58.8,-35.75 -55.55,-35.75 -52.75,-38.55 U200.142@-52.75,-39.45
PB12: J200.2@-27.442,-51.755 R301.2 R900.2 U200.87 | length 85.8
  Top Layer LF-Signals w0.175: v1(-82.05,-29.725) R301.2@-82.05,-25.425 ; U200.87@-34.395,-51.755 J200.2@-27.442,-51.755
  Signal Layer 1 w0.2: v1(-35.125,-29.75) -33.965,-30.91 -31.711,-30.91 -28.69,-33.931 -28.69,-50.507 J200.2@-27.442,-51.755
  Signal Layer 2 w0.2: v1(-82.05,-29.725) -35.15,-29.725 v1(-35.125,-29.75)
  Bottom Layer LF-Signals w0.175: R900.2@-35.175,-28.625 -35.125,-28.675 v1(-35.125,-29.75)
PB13: J400.5 J504.5@-67.93,-88.674 U200.144 | length 68.5
  Top Layer LF-Signals w0.18: J504.5@-67.93,-88.674 -69.676,-88.674 -71.168,-87.182 -71.168,-51.932 -72.526,-50.574 -70.2,-48.248 -70.2,-42.725 -69.2,-41.725 -65.975,-41.725 -62.65,-38.4 -58.065,-38.4 -57.015,-39.45 U200.144@-53.75,-39.45
PC00: R235.1 U200.11 | length 3
  Top Layer LF-Signals w0.179: U200.11@-55.6,-46.25 v1(-54.3,-46.25)
  Bottom Layer LF-Signals w0.179: v1(-54.3,-46.25) -53.957,-46.593 -52.876,-46.593 R235.1@-52.767,-46.702
PC01: R236.1 U200.38 | length 3.9
  Top Layer LF-Signals w0.179: R236.1@-55.111,-63.3 -55.111,-62.75 -54.119,-61.758 -53.473,-61.758 -53.25,-61.535 U200.38@-53.25,-60.55
PC02: R237.1 U200.39 | length 3.4
  Top Layer LF-Signals w0.179: R237.1@-54.124,-63.3 -54.124,-62.77 -53.759,-62.405 -53.568,-62.405 -52.75,-61.587 U200.39@-52.75,-60.55
PC03: R238.1 U200.40 | length 3.1
  Top Layer LF-Signals w0.179: R238.1@-53.137,-63.3 -53.137,-62.819 -52.25,-61.932 U200.40@-52.25,-60.55
PC04: R239.1 U200.41 | length 2.9
  Top Layer LF-Signals w0.179: R239.1@-52.151,-63.3 -52.151,-62.46 -51.75,-62.059 U200.41@-51.75,-60.55
PC05: R240.1 U200.58 | length 2.9
  Top Layer LF-Signals w0.179: R240.1@-43.25,-63.3 -43.433,-63.117 -43.433,-61.67 -43.25,-61.487 U200.58@-43.25,-60.55
PC06: R241.1 U200.54 | length 2.7
  Top Layer LF-Signals w0.179: R241.1@-45.25,-63.3 U200.54@-45.25,-60.55
PC07: R242.1 U200.48 | length 3.1
  Top Layer LF-Signals w0.179: R242.1@-48.975,-63.3 -48.975,-62.862 -48.286,-62.174 -48.286,-60.586 U200.48@-48.25,-60.55
PC08: J404.35 U200.82 | length 72.2
  Top Layer LF-Signals w0.15: J404.35@-86.15,-84.1 v1(-85.1,-84.1) ; v1(-36.325,-54.25) U200.82@-34.4,-54.25
  Signal Layer 1 w0.15: v1(-85.1,-84.1) -81.797,-84.1
  Signal Layer 1 w0.175: -81.797,-84.1 -73.856,-76.158 -73.856,-65.269 -70.653,-62.067 v3(-70.653,-59.628)
  Signal Layer 2 w0.15: v3(-70.653,-59.628) -64.621,-59.628 -64.324,-59.925 -47.161,-59.925 -44.844,-57.608 -41.965,-57.608 -38.607,-54.25 v1(-36.325,-54.25)
PC09: J202.2@-27.442,-38.89 U200.86 | length 23.4
  Top Layer LF-Signals w0.15: U200.86@-34.4,-52.25 -29.011,-52.25 -28.374,-52.886 -26.511,-52.886 -26.071,-52.446 -26.071,-51.004 v1(-26.975,-50.1)
  Signal Layer 1 w0.15: J202.2@-27.442,-38.89 -26.367,-39.965 -26.367,-42.029 -26.975,-42.637 v1(-26.975,-50.1)
PC09_LED: D300.1 J202.1@-27.442,-41.43 J404.46 J500.2@-19.67,-43.97 | length 149.2
  Top Layer LF-Signals w0.15: J404.46@-86.15,-89.6 v1(-85.175,-89.6) ; D300.1@-84.955,-28.35 v1(-83.775,-28.35)
  Signal Layer 1 w0.175: v1(-85.175,-89.6) -86.257,-88.518 -86.257,-59.593 v1(-86.775,-59.075) -88.25,-57.6 -88.25,-29.175 -87.425,-28.35 v1(-83.775,-28.35)
  Signal Layer 2 w0.15: v1(-86.775,-59.075) -85,-57.3 -68.859,-57.3 -68.658,-57.099 -62.899,-57.099 -62.534,-56.733 -60.105,-56.733 -58.538,-58.3 -51.186,-58.3 -45.853,-52.967 -38.398,-52.967 -37.684,-52.253 -35.928,-52.253 v1(-35.925,-52.25)
  Bottom Layer LF-Signals w0.15: v1(-35.925,-52.25) -35.053,-52.25 -34.653,-51.85 -31.35,-51.85 -27.442,-47.942 J202.1@-27.442,-41.43 -26.01,-41.43 -23.47,-43.97
  Bottom Layer LF-Signals w0.175: -23.47,-43.97 J500.2@-19.67,-43.97
PC09_VBUS_DETECT: J202.3@-27.442,-36.35 R305.1 R306.2 | length 6.4
  Top Layer LF-Signals w0.18: R305.1@-31.115,-32.6 R306.2@-29.742,-32.6 -29.742,-33.269 -29.143,-33.868 -28.55,-33.868 -27.442,-34.976 J202.3@-27.442,-36.35
PC10: C713.1 R702.1 U200.90 U700.28 | length 68.1
  Top Layer LF-Signals w0.175: U200.90@-34.4,-50.25 -34.4,-50.237 -28.69,-50.237 -28.029,-49.576 -24.849,-49.576 -21.3,-53.125 -21.3,-61.45 -20.775,-61.975 -18.05,-61.975 -16.3,-63.725 -16.3,-76.25 -16.275,-76.225 v1(-16.275,-76.2) ; v3@-16.875,-94.6 R702.1@-16.875,-95.975 -15.8,-95.975 -15.8,-95.9 C713.1@-15.75,-95.85 ; C713.1@-15.75,-96.025 C713.1@-15.75,-95.85 ; U700.28@-11.025,-95.625 -11.65,-95.625 -11.688,-95.587 -12.637,-95.587 -12.8,-95.425 -15.325,-95.425 C713.1@-15.75,-95.85
  Bottom Layer LF-Signals w0.175: v3@-16.875,-94.6 -16.875,-76.8 v1(-16.275,-76.2)
  other v3: -16.861,-94.586
PC11: J404.36 U200.94 | length 82.4
  Top Layer LF-Signals w0.15: J404.36@-86.15,-84.6 v1(-84.433,-84.6) ; v1(-35.827,-48.327) -34.477,-48.327 U200.94@-34.4,-48.25
  Signal Layer 1 w0.175: v1(-84.433,-84.6) -81.6,-84.6 -73.35,-76.35 -73.35,-68.788 -69.825,-65.263 -69.825,-59.525 -70.653,-58.697 v3(-70.653,-51.753)
  Signal Layer 2 w0.15: v1@-35.902,-48.327 v1(-35.827,-48.327)
  Signal Layer 2 w0.175: v3(-70.653,-51.753) -65.928,-51.753 -64.363,-50.187 -60.296,-50.187 -57.933,-52.55 -48.689,-52.55 -44.914,-48.776 -36.275,-48.776 v1(-35.827,-48.327)
PC12: C1001.1 J507.33 U200.17 U1000.4 | length 79.6
  Top Layer LF-Signals w0.18: v1(-63.028,-50.727) -62.902,-50.727 -61.425,-49.25 U200.17@-55.6,-49.25 ; v1(-55.85,-115.6) C1001.1@-55.85,-116.58 -55.85,-117.08 -55.262,-117.668 U1000.4@-54.925,-117.668
  Signal Layer 1 w0.18: v1(-63.028,-50.727) -63.028,-96.116 J507.33@-60.31,-98.834 -61.575,-100.099 -61.575,-102.325 -58.825,-105.075 -58.825,-112.625 v1(-55.85,-115.6)
PC13: J402.4@-4.43,-66.83 J404.47 J502.5@-67.93,-65.814 U200.19 | length 126.7
  Top Layer LF-Signals w0.15: J404.47@-86.15,-90.1 -83.25,-90.1 v1(-83.2,-90.15)
  Top Layer LF-Signals w0.18: v1(-67.175,-54.125) -67.175,-53.5 -65.75,-52.075 -62.6,-52.075 -60.76,-50.235 -55.6,-50.235 U200.19@-55.6,-50.25
  Signal Layer 1 w0.175: v1(-83.2,-90.15) -81.7,-88.65 -81.7,-85.25 -71.616,-75.166 -71.616,-69.5 J502.5@-67.93,-65.814 -66.75,-64.634 -66.75,-54.55 v1(-67.175,-54.125)
  Signal Layer 2 w0.18: J502.5@-67.93,-65.814 -58.475,-65.814 -57.442,-64.781 -49.48,-64.781 -46.945,-67.315 -44.587,-67.315 -44.285,-67.013 -44.285,-66.994 -43.576,-66.285 -35.848,-66.285 -34.243,-67.89 -21.657,-67.89 -21.031,-67.264 -15.636,-67.264 -14.9,-68 -5.6,-68 J402.4@-4.43,-66.83
PC14: J507.34 U200.97 U1000.1 | length 104.7
  Top Layer LF-Signals w0.18: U1000.1@-52.975,-117.668 -52.593,-117.668 -52.2,-117.275 -52.25,-117.225 v1(-52.25,-115.275) ; v1(-45.025,-47.575) -43.885,-46.435 -38.222,-46.435 -37.732,-46.925 -36.658,-46.925 -36.483,-46.75 U200.97@-34.4,-46.75
  Signal Layer 1 w0.15: v1(-62.535,-49.575) -62.528,-49.582 -62.528,-50.942 -62.535,-50.948 -62.535,-94.765 -62.5,-94.8
  Signal Layer 1 w0.18: -62.5,-94.8 -59.125,-98.175 -59.125,-100.189 J507.34@-60.31,-101.374 -58.495,-103.189 -58.495,-109.03 v1(-52.25,-115.275)
  Signal Layer 2 w0.15: v1(-62.535,-49.575) -57.016,-49.575 -55.706,-50.885 -53.766,-50.885 -50.456,-47.575 v1(-45.025,-47.575)
PC15: R266.1 U200.18 | length 3.1
  Top Layer LF-Signals w0.179: U200.18@-55.6,-49.75 v3(-54.3,-49.75)
  Bottom Layer LF-Signals w0.179: v3(-54.3,-49.75) -53.537,-50.513 R266.1@-52.767,-50.513
PC16: R307.2 U200.100 | length 53.7
  Top Layer LF-Signals w0.15: v3(-39.1,-30.25) -39.1,-25.2 -38.575,-24.675 -34.65,-24.675 -33.422,-23.447 -33.422,-18.847 -28.05,-13.475 -28.05,-12.05 -29.45,-10.65 v1(-29.45,-8.65) ; v1(-37.227,-45.227) -37.204,-45.25 U200.100@-34.4,-45.25
  Signal Layer 1 w0.15: v3(-39.1,-30.25) -38.062,-31.288 -38.062,-31.583 -36.505,-33.14 -36.505,-40.956 -37.227,-41.677 v1(-37.227,-45.227)
  Bottom Layer LF-Signals w0.15: R307.2@-31.475,-4.075 -31.475,-6.625 -30.975,-7.125
  Bottom Layer LF-Signals w0.175: -30.975,-7.125 v1(-29.45,-8.65)
PC17: Q106.1 R127.1 U200.103 | length 92.4
  Top Layer LF-Signals w0.18: v1(-35.925,-43.75) U200.103@-34.4,-43.75
  Signal Layer 1 w0.18: v3(-81.55,-44.1) -81.55,-30.727 -80.45,-29.627 -80.45,-22.775 v1(-81.25,-21.975)
  Signal Layer 2 w0.18: v3(-81.55,-44.1) -80.55,-45.1 -71.325,-45.1 -70.475,-44.25 -66.798,-44.25 -63.938,-47.111 -60.008,-47.111 -58.51,-45.613 -54.369,-45.613 -51.566,-42.81 -49.625,-42.81 -47.795,-44.64 -42.134,-44.64 -41.244,-43.75 v1(-35.925,-43.75)
  Bottom Layer LF-Signals w0.175: Q106.1@-86.775,-9.5 -86.775,-8.475 R127.1@-86.325,-8.025
  Bottom Layer LF-Signals w0.18: Q106.1@-86.775,-9.5 -86.775,-9.85 -86.15,-10.475 -84.425,-10.475 -81.25,-13.65 v1(-81.25,-21.975)
PC18: R267.1 U200.111 | length 3.8
  Top Layer LF-Signals w0.179: U200.111@-37.25,-39.45 -37.25,-38.075 -37.1,-37.925 v3(-37.1,-36.75)
  Bottom Layer LF-Signals w0.179: R267.1@-37.1,-37.825 v3(-37.1,-36.75)
PC19: J400.6 J402.7@-6.97,-71.91 J503.7@-19.67,-53.114 U200.117 | length 114.9
  Top Layer LF-Signals w0.175: v1@-78.661,-51.827 J400.6@-78.661,-50.574 ; v1@-40.257,-40.796 U200.117@-40.257,-39.071
  Signal Layer 1 w0.175: v1(-79.475,-41.525) -79.475,-45.125 -78.658,-45.942 v1(-78.658,-51.83)
  Signal Layer 1 w0.18: v1(-21.725,-40.55) -20.875,-41.4 -20.875,-51.909 J503.7@-19.67,-53.114 -13.386,-53.114 -12.075,-54.425 -12.075,-66.805 J402.7@-6.97,-71.91
  Signal Layer 2 w0.18: v1(-79.475,-41.525) -79.1,-41.15 -72,-41.15 -71.646,-41.504 -66.169,-41.504 -63.885,-39.22 -53.638,-39.22 -53.117,-39.741 -41.259,-39.741 v1(-40.25,-40.75) -39.731,-40.231 -31.346,-40.231 -31.125,-40.01 -25.409,-40.01 -24.869,-40.55 v1(-21.725,-40.55)
PC20: R251.1 U200.120 | length 2.1
  Top Layer LF-Signals w0.179: v3(-41.75,-40.65) U200.120@-41.75,-39.45
  Bottom Layer LF-Signals w0.179: R251.1@-41.75,-41.526 v3(-41.75,-40.65)
PC21: R252.1 U200.122 | length 2.1
  Top Layer LF-Signals w0.179: v1(-42.8,-40.75) -42.8,-39.5 U200.122@-42.75,-39.45
  Bottom Layer LF-Signals w0.179: v1(-42.8,-40.75) -42.8,-41.476 R252.1@-42.75,-41.526
PC22: R253.1 U200.124 | length 2.1
  Top Layer LF-Signals w0.179: v3@-43.75,-40.75 v3(-43.75,-40.65) U200.124@-43.75,-39.45
  Bottom Layer LF-Signals w0.179: R253.1@-43.75,-41.526 v3@-43.75,-40.75
PC23: R254.1 U200.127 | length 2.1
  Top Layer LF-Signals w0.179: v3@-45.25,-40.75 v3(-45.25,-40.65) U200.127@-45.25,-39.45
  Bottom Layer LF-Signals w0.179: R254.1@-45.25,-41.526 v3@-45.25,-40.75
PC24: R255.1 U200.130 | length 2.2
  Top Layer LF-Signals w0.179: v3@-46.75,-40.75 v3(-46.75,-40.65) U200.130@-46.75,-39.45
  Bottom Layer LF-Signals w0.179: R255.1@-46.75,-41.526 -46.75,-40.75 v3@-46.612,-40.75
PC25: R256.1 U200.133 | length 2.1
  Top Layer LF-Signals w0.179: v3@-48.25,-40.75 v3(-48.25,-40.65) U200.133@-48.25,-39.45
  Bottom Layer LF-Signals w0.179: R256.1@-48.25,-41.526 v3@-48.25,-40.75
PC26: R257.1 U200.13 | length 3.5
  Top Layer LF-Signals w0.179: U200.13@-55.6,-47.25 -54.807,-47.25 -54.395,-47.662 -54.395,-47.835 -54.109,-48.121 v3(-53.683,-48.121)
  Bottom Layer LF-Signals w0.179: v3(-53.683,-48.121) -53.203,-48.6 R257.1@-52.767,-48.6
PC27: R258.1 U200.12 | length 3.2
  Top Layer LF-Signals w0.179: U200.12@-55.6,-46.75 -55.6,-46.765 -54.45,-46.765 v1(-54.105,-47.11)
  Bottom Layer LF-Signals w0.179: v1(-54.105,-47.11) -53.299,-47.11 R258.1@-52.767,-47.641
PC28: R259.1 U200.76 | length 2.4
  Top Layer LF-Signals w0.179: v1(-35.95,-57.25) U200.76@-34.4,-57.25
  Bottom Layer LF-Signals w0.179: R259.1@-36.771,-57.251 -35.951,-57.251 v1(-35.95,-57.25)
PC29: R260.1 U200.16 | length 3.2
  Top Layer LF-Signals w0.179: U200.16@-55.6,-48.75 v1(-54.3,-48.75)
  Bottom Layer LF-Signals w0.179: v1(-54.3,-48.75) -53.5,-49.55 R260.1@-52.767,-49.55
PC30: J401.8@-4.43,-36.35 J404.33 U200.15 | length 122
  Top Layer LF-Signals w0.15: J404.33@-86.15,-83.1 v1(-85.1,-83.1)
  Top Layer LF-Signals w0.18: v1(-29.775,-43.75) -21.489,-43.75 -20.619,-42.88 -16.955,-42.88 -11.7,-37.625 -5.705,-37.625 J401.8@-4.43,-36.35
  Top Layer LF-Signals w0.2: v1(-57.005,-48.25) U200.15@-55.6,-48.25
  Signal Layer 1 w0.15: v1(-85.1,-83.1) -81.95,-83.1
  Signal Layer 1 w0.175: -81.95,-83.1 -75.375,-76.525 -75.375,-65.45 -71.55,-61.625 -71.55,-47.675 v1(-70.8,-46.925)
  Signal Layer 2 w0.2: v1(-70.8,-46.925) -70.8,-47.831 -69.335,-49.296 -63.75,-49.296 -63.437,-48.983 -57.738,-48.983 v1(-57.005,-48.25)
  Bottom Layer LF-Signals w0.175: -54.12,-51.135 -54.105,-51.151 -43.372,-51.151 -42.986,-50.764
  Bottom Layer LF-Signals w0.18: v1(-57.005,-48.25) -54.12,-51.135 ; -42.986,-50.764 -39.107,-46.886 -35.412,-46.886 -33.883,-45.357
  Bottom Layer LF-Signals w0.2: -33.883,-45.357 -31.382,-45.357 v1(-29.775,-43.75)
PC31: J401.3@-6.97,-31.27 J502.2@-67.93,-58.194 U200.14 | length 89.2
  Top Layer LF-Signals w0.18: -65.372,-58.194 -63.055,-55.877 -63.055,-54.255 v1(-61.975,-53.175) ; v1(-58.7,-47.95) -58.17,-47.95 -57.955,-47.735 U200.14@-55.6,-47.735
  Top Layer LF-Signals w0.2: J502.2@-67.93,-58.194 -65.372,-58.194
  Signal Layer 1 w0.18: v1(-61.975,-53.175) -61.975,-51.22 v1@-58.705,-47.95
  Signal Layer 2 w0.18: v1(-61.975,-53.175) -60.894,-52.094 -59.949,-52.094 -58.808,-53.235 -48.444,-53.235 -44.642,-49.433 -35.735,-49.433 -35.061,-48.759 -24.992,-48.759 -24.621,-48.388 -16.634,-48.388 -11.836,-43.59 -11.836,-34.311 -8.795,-31.27 J401.3@-6.97,-31.27
PD00: J504.6@-67.93,-91.214 R711.1 U200.1 U700.19 | length 153.7
  Top Layer LF-Signals w0.15: U700.19@-7.925,-93.525 v1(-7.925,-91.825)
  Top Layer LF-Signals w0.18: v1(-56.894,-40.653) -56.297,-41.25 U200.1@-55.6,-41.25 ; R711.1@-27.863,-85.323 v1(-26.819,-85.323)
  Signal Layer 1 w0.18: v1(-32.975,-42.5) -32.41,-43.065 -32.41,-51.414 -31.95,-51.874 -31.95,-70.537 -30.478,-72.009 -30.478,-81.664 v1(-26.819,-85.323) -26.377,-85.323 -24.116,-87.584 -17.683,-87.584 -14.892,-90.375 -9.375,-90.375 v1(-7.925,-91.825)
  Signal Layer 2 w0.18: J504.6@-67.93,-91.214 -60.139,-91.214 -59.168,-92.185 -33.681,-92.185 v1(-26.819,-85.323)
  Bottom Layer LF-Signals w0.18: v1(-56.894,-40.653) -55.559,-39.318 -55.559,-34.143 -52.152,-30.736 -41.102,-30.736 -32.975,-38.862 v1(-32.975,-42.5)
PD01: U200.132 U700.21 | length 89.5
  Top Layer LF-Signals w0.15: U200.132@-47.75,-39.45 v1(-47.75,-38.15) ; v3(-12.075,-87.2) -8.925,-90.35 U700.21@-8.925,-93.525
  Signal Layer 1 w0.18: v1(-23.3,-38.356) -23.3,-41.703 -22.711,-42.291 -22.711,-43.694 -22.28,-44.126 -22.28,-78.834 -21.15,-79.964 -18.861,-79.964 -12.075,-86.75 v3(-12.075,-87.2)
  Signal Layer 2 w0.18: v1(-47.75,-38.15) -46.625,-39.275 -37.748,-39.275 -37.54,-39.067 -30.564,-39.067 -29.289,-37.792 -26.069,-37.792 -25.505,-38.356 v1(-23.3,-38.356)
PD02: U200.131 U700.22 | length 89.7
  Top Layer LF-Signals w0.18: U200.131@-47.25,-39.45 -47.25,-38.689 -46.967,-38.406 v1(-46.967,-37.813) ; v3(-13.8,-86.575) -9.425,-90.95 -9.425,-92.525 U700.22@-9.425,-93.525
  Signal Layer 1 w0.18: v1(-23.825,-37.462) -23.825,-45.237 -22.95,-46.112 -22.95,-79.734 -20.54,-82.144 -17.485,-82.144 -13.8,-85.829 v3(-13.8,-86.575)
  Signal Layer 2 w0.18: v1(-46.967,-37.813) -45.835,-38.945 -37.884,-38.945 -37.677,-38.737 -30.701,-38.737 -29.425,-37.462 v1@-23.876,-37.462
PD03: U200.128 U700.23 | length 91.3
  Top Layer LF-Signals w0.15: U200.128@-45.75,-39.45 v1(-45.75,-38.15)
  Top Layer LF-Signals w0.18: v3(-13.425,-87.925) -9.925,-91.425 U700.23@-9.925,-93.525
  Signal Layer 1 w0.18: v1(-24.45,-35.023) -24.45,-45.079 -23.28,-46.249 -23.28,-79.906 -20.682,-82.504 -17.592,-82.504 -14.96,-85.136 -14.96,-86.39 v3(-13.425,-87.925)
  Signal Layer 2 w0.18: v1(-45.75,-38.15) -45.274,-38.15 -44.809,-38.615 -38.021,-38.615 -37.814,-38.407 -30.837,-38.407 -29.031,-36.601 -29.031,-35.778 -28.276,-35.023 v1(-24.45,-35.023) v1@-24.288,-35.023
PD04: J403.14 R713.1 R718.2 U200.126 U700.13 | length 118.6
  Top Layer LF-Signals w0.185: U200.126@-44.75,-39.45 -44.75,-38.66 -45.172,-38.239 -45.172,-37.838 -45.903,-37.106 -45.903,-36.703 v3(-44.75,-35.55) ; v1(-42.23,-23.969) J403.14@-42.23,-21.91 ; R713.1@-27.869,-88.773 v5(-26.825,-88.773) R718.2@-25.794,-88.773 ; U700.13@-6.325,-95.625 -5.9,-95.625 -5.8,-95.525 -5.193,-95.525 -5.043,-95.675 v1(-4.475,-95.675)
  Signal Layer 1 w0.185: v3(-44.75,-35.55) -44.75,-26.489 v1(-42.23,-23.969) ; v1(-34.552,-35.552) -34.51,-35.593 -34.51,-50.09 -34.075,-50.525 -34.075,-71.2 -32.125,-73.15 -32.125,-84.146 -27.498,-88.773 v5(-26.825,-88.773) -22.473,-93.125 -20.1,-93.125 -14.377,-98.847 -11.501,-98.847 -10.491,-97.838 -6.309,-97.838 -5.114,-96.642 -5.111,-96.642 -4.475,-96.007 v1(-4.475,-95.675)
  Signal Layer 2 w0.185: v3(-44.75,-35.55) v1(-34.552,-35.552) v1(-34.552,-35.552)
PD05: J403.16 R705.1 R719.1 U200.125 U700.18 | length 109.7
  Top Layer LF-Signals w0.185: v1(-44.625,-37.975) -44.25,-38.35 U200.125@-44.25,-39.45 ; v3(-43.5,-23.969) J403.16@-43.5,-21.91 ; R705.1@-27.863,-84.173 v1(-26.819,-84.173) R719.1@-25.788,-84.173 ; U700.18@-7.425,-93.525 v1(-7.425,-92.525)
  Signal Layer 1 w0.185: v1(-44.625,-37.975) -44.625,-36.624 -45.461,-35.788 -45.461,-25.93 v3(-43.5,-23.969) ; v1(-32.05,-36.125) -32.05,-49.425 -31.1,-50.375 -31.1,-51.573 -31.542,-52.016 -31.542,-70.474 -30.145,-71.872 -30.145,-80.894 -26.866,-84.173 v1(-26.819,-84.173) -23.765,-87.226 -19.217,-87.226 ; -19.217,-87.226 -17.574,-87.226 -17.549,-87.251 -17.545,-87.251 -14.846,-89.95 -9.068,-89.95 -7.408,-91.611 -7.408,-92.508 v1(-7.425,-92.525)
  Signal Layer 2 w0.185: v1(-44.625,-37.975) -44.625,-37.55 -42.972,-35.897 -36.747,-35.897 -36.575,-36.07 -32.105,-36.07 v1(-32.05,-36.125)
PD06: J403.18 R708.1 R715.1 U200.121 U700.17 | length 110.3
  Top Layer LF-Signals w0.185: v1(-44.77,-23.969) J403.18@-44.77,-21.91 ; U200.121@-42.25,-39.45 v1(-42.25,-38.075) ; R708.1@-27.869,-83.023 v1(-26.825,-83.023) R715.1@-25.794,-83.023 ; U700.17@-6.925,-93.525 -6.907,-93.507 -6.907,-92.607 v1(-6.5,-92.2)
  Signal Layer 1 w0.185: v1(-44.77,-23.969) -43.925,-23.123 -42.054,-23.123 -41.527,-23.65 -41.527,-24.417 -41.75,-24.639 -41.75,-35.159 -42.25,-35.659 v1(-42.25,-38.075) ; v3(-31.25,-37.375) -30.508,-38.118 -30.508,-61.622 -30.618,-61.732 -30.618,-70.082 -28.275,-72.425 -28.275,-81.573 v1(-26.825,-83.023) -24.577,-83.023 -22.584,-85.016 -18.458,-85.016 -13.9,-89.575 -8.428,-89.575 -6.5,-91.503 v1(-6.5,-92.2)
  Signal Layer 2 w0.185: v1(-42.25,-38.075) -42.25,-37.375 -41.107,-36.232 -36.886,-36.232 -36.713,-36.405 -33.395,-36.405 -32.425,-37.375 v3(-31.25,-37.375)
PD07: J403.20 R707.1 R714.1 U200.119 U700.12 | length 113.6
  Top Layer LF-Signals w0.185: v3(-46.04,-23.969) J403.20@-46.04,-21.91 ; U200.119@-41.25,-39.45 v1(-41.25,-38.075) ; R707.1@-27.869,-86.473 v1(-26.825,-86.473) R714.1@-25.794,-86.473 ; U700.12@-6.325,-96.125 v1(-5.325,-96.125)
  Signal Layer 1 w0.185: v3(-46.04,-23.969) -44.781,-22.71 -41.802,-22.71 -40.976,-23.536 -40.976,-24.692 -41.281,-24.997 -41.281,-35.657 -41.827,-36.203 -41.827,-37.498 v1(-41.25,-38.075) ; v1(-33.375,-37.3) -33.85,-37.775 -33.85,-49.817 -33.415,-50.252 -33.415,-51.16 -32.282,-52.293 -32.282,-70.675 -30.81,-72.147 -30.81,-82.488 v1(-26.825,-86.473) -26.822,-86.476 -26.174,-86.476 -22.884,-89.766 -19.217,-89.766 -19.215,-89.764 -17.411,-89.764 -14.075,-93.1 -8.35,-93.1 v1(-5.325,-96.125)
  Signal Layer 2 w0.185: v1(-41.25,-38.075) -39.978,-38.075 -39.978,-38.071 -39.464,-37.557 -36.453,-37.557 -36.368,-37.643 -33.718,-37.643 v1(-33.375,-37.3)
  Bottom Layer LF-Signals w0.185: v1@-41.268,-38.057 v1(-41.25,-38.075)